# Altium PCB TRV1.0.PcbDoc (part 1 of 2)
Units mil, origin at the board's own origin, x right, y up, seen from the top; angles counter-clockwise.
Board outline 1659.57 x 2276.55 mil, 2 copper layers (Top Layer, Bottom Layer); 70 components, 42 nets, 217 pads, 204 vias.
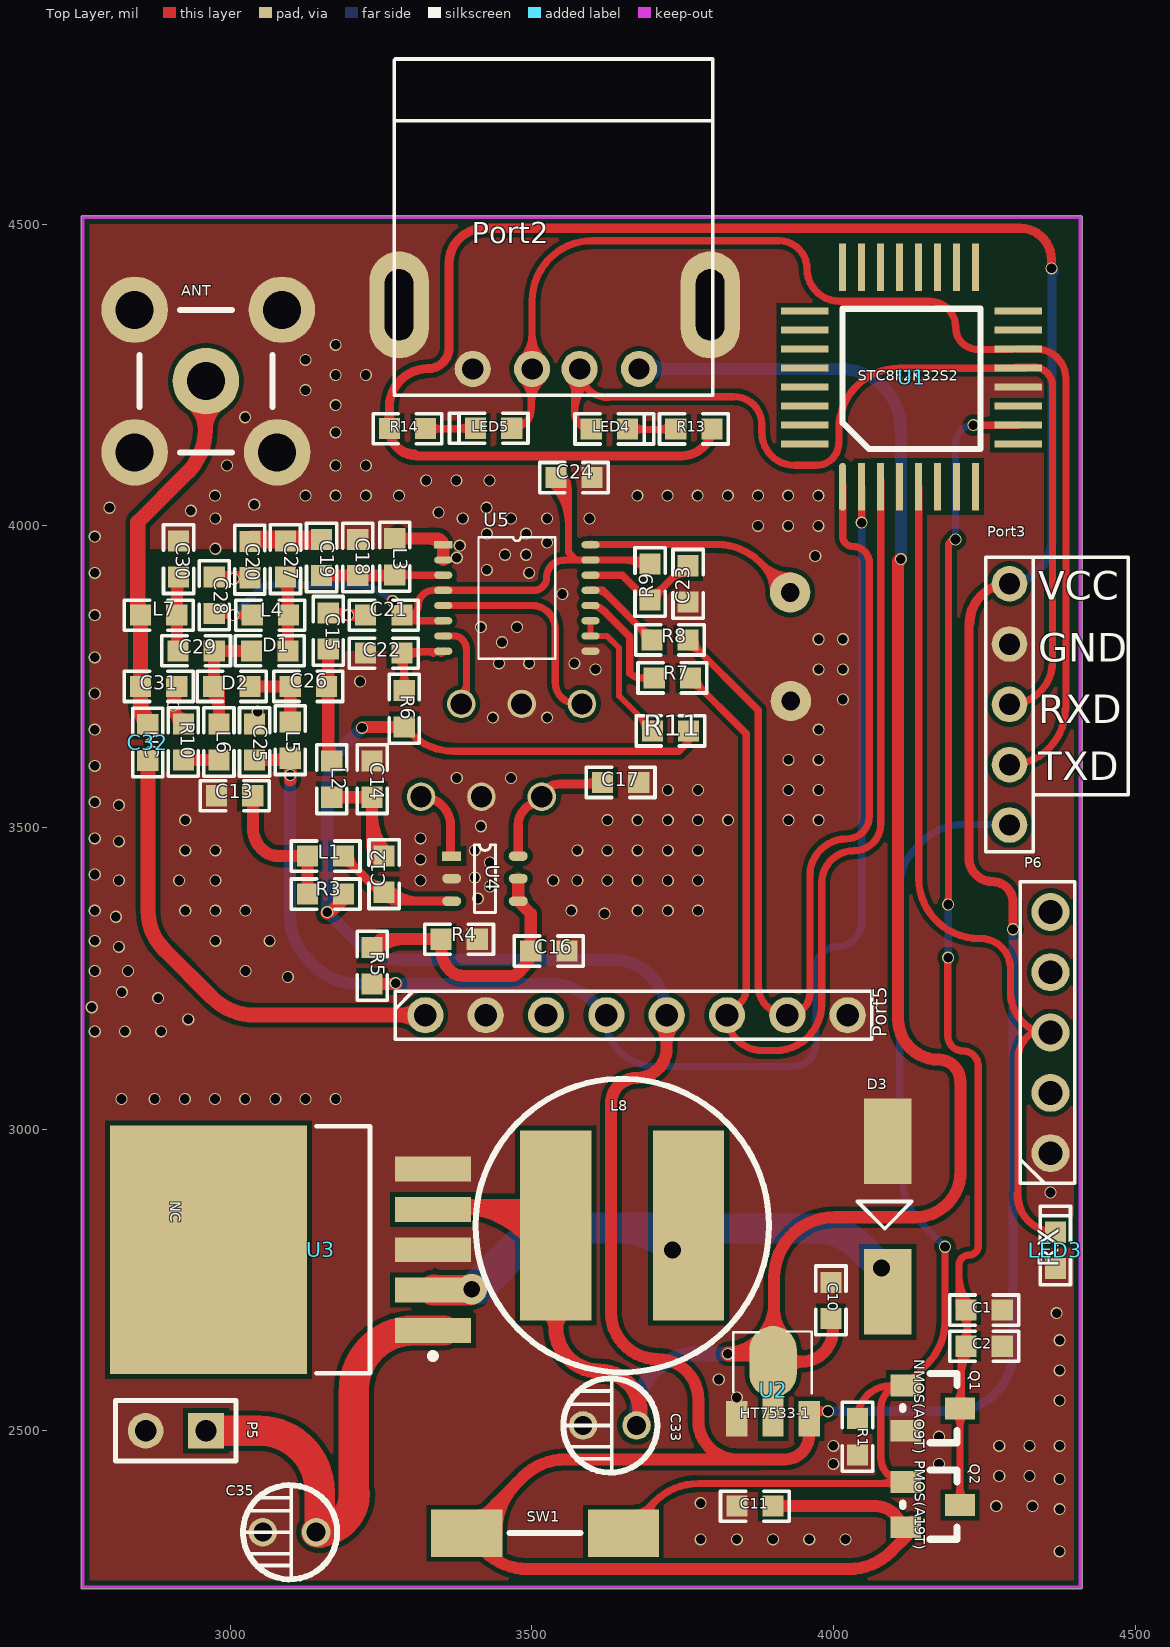
[diagram p0: Top Layer view]
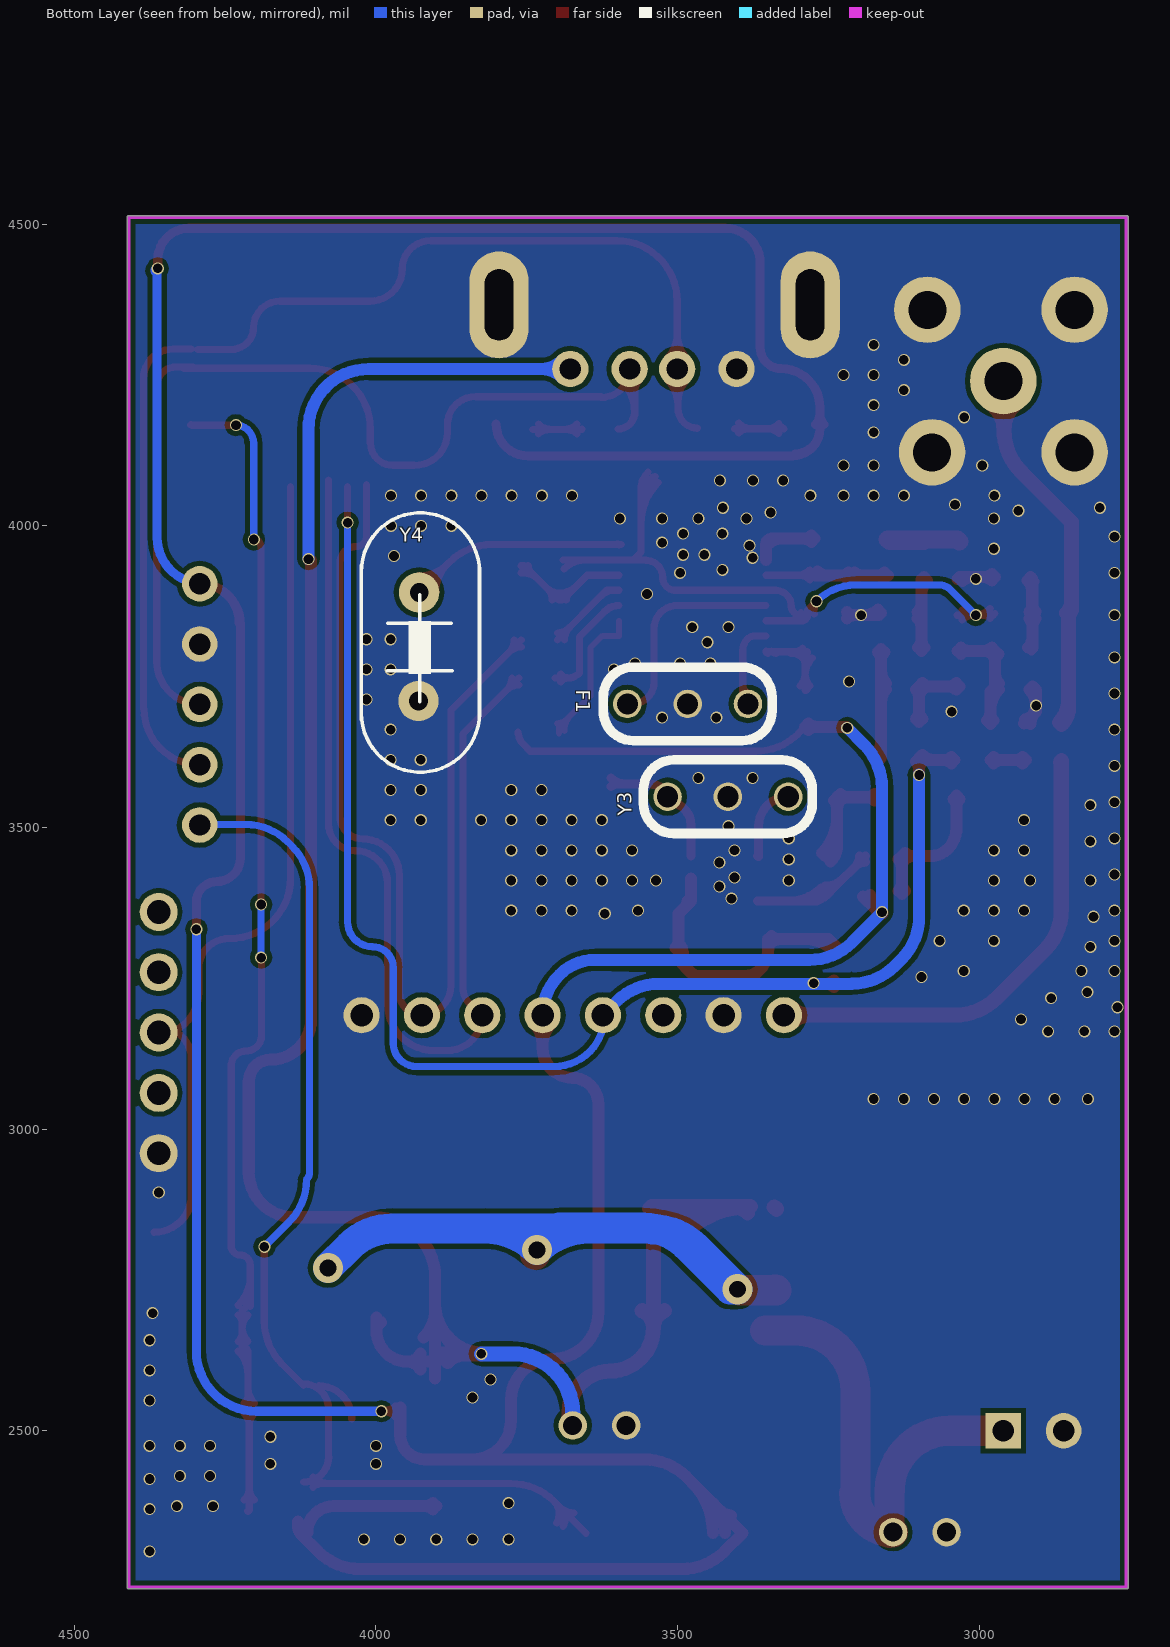
[diagram p1: Bottom Layer view, seen from below]

## Layer stack, top to bottom
Top Layer: signal copper 1.4
Dielectric: dielectric 12.6, FR-4, Dk 4.8
Bottom Layer: signal copper 1.4

## Board outline
2752.89,2240.7 2752.89,4511.22 cw(c2755.91,4511.22) 2755.91,4514.24 4409.45,4514.24 cw(c4409.45,4511.22) 4412.46,4511.22 4412.46,2240.7 cw(c4409.45,2240.7) 4409.36,2237.69 cw(c4409.28,2240.7) 4409.28,2237.69 2755.91,2237.69 cw(c2755.91,2240.7)

## Design rules (kind name [scope] priority, off if disabled: settings)
Clearance [All] p1: gap=8
PolygonConnect [All] p1: connectstyle=Direct reliefconductorwidth=10 reliefentries=4 polygonreliefangle="90 Angle"
RoomDefinition TRV1.0 [InComponentClass('TRV1.0')] p1: confinementstyle=ConfineIn formatcopy=TRUE lockcomponents=FALSE outline 0,0 2000,0 2000,1000 0,1000
RoutingVias [All] p1: holewidth=128 width=150 viastyle="Through Hole" minholewidth=2 minwidth=5 maxholewidth=28 maxwidth=50
SilkscreenOverComponentPads [All] p1: minsilkscreentomaskgap=10
SolderMaskExpansion [All] p1: expansion=4
Width [All] p1: maxlimit=80 minlimit=10 preferedwidth=10
27 further rules are at their usual default settings.

## Components (designator, comment, footprint, x,y, rotation, side; value= is the part's Value field where it differs from the comment)
ANT "SMA" SWA-KE天线母座 2960,4240 r0 top
C1 "1uF" 0603 4280,2700 r180 top
C2 "104" 0603 4280,2640 r180 top
C10 "1uF" 0603 3996,2686 r90 top
C11 "104" 0603 3900,2375 r180 top
C12 "220pF5%" 0603 3255.19,3452.57 r270 top
C13 "104" 0603 2977.62,3552.65 r0 top
C14 "4.7pF5%" 0603 3235.5,3610.05 r270 top
C15 "12pF5%" 0603 3162.66,3855.8 r270 top
C16 "104" 0603 3558.34,3295.09 r180 top
C17 "1pF+-0.25P" 0603 3617.39,3574.62 r0 top
C18 "NC" 0603 3211.64,3977.53 r270 top
C19 "1pF+-0.25P" 0603 3151.64,3977.53 r270 top
C20 "NC" 0603 3032.74,3973.91 r270 top
C21 "104" 0603 3284.71,3851.86 r180 top
C22 "104" 0603 3284.71,3788.87 r180 top
C23 "104" 0603 3759.12,3873.83 r90 top
C24 "104" 0603 3600,4080 r180 top
C25 "104" 0603 3040.62,3611.71 r90 top
C26 "220pf5%" 0603 3099.67,3733.75 r0 top
C27 "NC" 0603 3091.8,3914.86 r90 top
C28 "104" 0603 2973.69,3914.86 r270 top
C29 "220pF5%" 0603 2973.69,3792.81 r180 top
C30 "NC" 0603 2914.63,3914.86 r90 top
C31 "NC" 0603 2851.64,3733.75 r0 top
C32 "NC" 0603 2863.45,3670.76 r270 top
C33 "NC" CAP6*12 3471,2617 r180 top
C35 "NC" CAP6*12 2940,2440 r180 top
D1 "SMP1320" 0603 3095.73,3792.81 r180 top
D2 "SMP1320" 0603 3032.74,3733.75 r180 top
D3 "NC" SS34 4040,2880 r270 top
F1 "10.7M" "PT4450 XTAL" 3483.25,3704.82 r0 bottom
L1 "180uH5%" 0603 3188.26,3452.57 r180 top
L2 "22nH5%" 0603 3168.57,3610.05 r270 top
L3 "47nH5%" 0603 3272.9,3918.79 r90 top
L4 "180nH5%" 0603 3036.68,3851.86 r0 top
L5 "180nH5%" 0603 3099.67,3674.7 r270 top
L6 "180nH5%" 0603 2981.56,3611.71 r90 top
L7 "0R" 0603 2851.64,3851.86 r0 top
L8 "33UH" CD75 3700,2840 r180 top
LED3 "RX" LED-0603 4368,2829 r270 top
LED4 "RX" LED-0603 3658.7,4160.62 r180 top
LED5 "TX" LED-0603 3406.91,4161.82 r0 top
P5 "BAT" DIP2-2.54 2960,2500 r180 top
P6 "PIN-5" PCBComponent_1 4360,3160 r90 top
Port2 "USB_A" USB-A 3540,4260 r180 top
Port3 "DEBUG" STC_DEBUG 4292,3704 r0 top
Port5 "Mold" Pin-8 3723.69,3188.79 r90 top
Q1 "NMOS(AO9T)" SOT-23 4165,2540 r270 top
Q2 "PMOS(A19T)" SOT-23 4165,2380 r270 top
R1 "1M" 0603 4040,2460 r90 top
R3 "0R" 0603 3188.26,3389.58 r180 top
R4 "100k" 0603 3349.67,3314.77 r0 top
R5 "0R" 0603 3235.5,3240.79 r90 top
R6 "10R" 0603 3288.65,3666.82 r90 top
R7 "10K" 0603 3763.06,3747.85 r180 top
R8 "10K" 0603 3759.12,3810.84 r180 top
R9 "NC" 0603 3696.13,3936.82 r270 top
R10 "3.3K1%" 0603 2922.51,3611.71 r90 top
R11 "0R" 0603 3700,3660 r0 top
R13 "1.3K" 0603 3738.7,4160.62 r0 top
R14 "1.3K" 0603 3324,4161 r180 top
SW1 "REST" SW-1 3463,2409 r90 top
U1 "STC8F2K32S2" LQPF-32 3980,4100 r90 top
U2 "HT7533-1" 3A5A3D 3900,2520 r0 top
U3 "NC" TS5B_N 3100,2800 r180 top
U4 "PT4450" PT4450 3365.42,3448.63 r270 top
U5 "PT4302" PT4302 3353.33,3968.6 r0 top
Y3 "433.92M" "PT4450 XTAL" 3416.6,3551 r180 bottom
Y4 "13.226M" "PT4306 XTAL" 3928.41,3889.58 r270 bottom

## Footprints (in the part's own frame and the unit in brackets; to place one, negate y for a bottom-side part, rotate by r counter-clockwise, add the part's x,y. Pads: shape width x height; smd on the part's side, far side on the other; paste and mask are expansions set on the pad)
3A5A3D [mm]
  rect 0.9x1.5 smd: 1(-1.524,0) 3(1.524,0)
  rect 0.9x1.8 smd: 2(0,0.15)
  oval 2x3 smd: 2(0,2.4)
  silkscreen extent -1.68,1.07 1.63,3.67
0603 [mil]
  rect 35x35 smd: 1(0,0) 2(60,0)
  silkscreen extent -27,-25 87,25
CAP6*12 [mm]
  round 1.2 hole 0.8: 1(-5.15,2.75) 2(-2.9,2.75)
  silkscreen extent -6.03,0.75 -2.05,4.75
CD75 [mm]
  rect 3x8 smd: 1(-1.524,0) 2(4.064,0)
  silkscreen extent -4.91,-6.18 7.45,6.18
DIP2-2.54 [mm] "Connector; Header; 2 Position"
  rect 1.5x1.5 hole 0.9: 1(0,0)
  round 1.5 hole 0.9: 2(2.54,0)
  silkscreen extent -1.27,-1.27 3.81,1.27
LED-0603 [mil]
  rect 35x35 smd: 1(0,0) 2(60,0)
  silkscreen extent -43,-25 87,25
LQPF-32 [mm]
  oct 2x0.3 smd: 1(-0.9,-0.9)
  rect 2x0.3 smd: 2(-0.9,-1.7) 3(-0.9,-2.5) 4(-0.9,-3.3) 5(-0.9,-4.1) 6(-0.9,-4.9) 7(-0.9,-5.7) 8(-0.9,-6.5) 17(8.35,-6.5) 18(8.35,-5.7) 19(8.35,-4.9) 20(8.35,-4.1) 21(8.35,-3.3) 22(8.35,-2.5) 23(8.35,-1.7) 24(8.35,-0.9)
  rect 0.3x2 smd: 9(0.9,-8.3) 10(1.7,-8.3) 11(2.5,-8.3) 12(3.3,-8.3) 13(4.1,-8.3) 14(4.9,-8.3) 15(5.7,-8.3) 16(6.5,-8.3) 25(6.5,0.7) 26(5.7,0.7) 27(4.9,0.7) 28(4.1,0.7) 29(3.3,0.7) 30(2.5,0.7) 31(1.7,0.7) 32(0.9,0.7)
  silkscreen extent 0.7,-6.7 6.6,-0.9
PCBComponent_1 [mm]
  round 1.6 hole 1: 1(-5.08,0) 2(-2.54,0) 3(0,0) 4(2.54,0) 5(5.08,0)
  silkscreen extent -6.35,-1.02 6.35,1.27
Pin-8 [mil]
  round 60 hole 37.4: 1(0,400) 2(0,300) 3(0,200) 4(0,100) 5(0,0) 6(0,-100) 7(0,-200) 8(0,-300)
  silkscreen extent -40,-340 40,450
PT4302 [mil]
  rect 30x12 smd: 1(0,0)
  oval 30x12 smd: 2(0,-25.2) 3(0,-50.39) 4(0,-75.59) 5(0,-100.79) 6(0,-125.99) 7(0,-151.18) 8(0,-176.38) 9(244.09,-176.38) 10(244.09,-151.18) 11(244.09,-125.99) 12(244.09,-100.79) 13(244.09,-75.59) 14(244.09,-50.39) 15(244.09,-25.2) 16(244.09,0)
  silkscreen extent 58,-189 186,13
"PT4306 XTAL" [mil]
  round 66.93 hole 31: 1(0,0) 2(180,-1)
  silkscreen extent -132,-96 298,100
PT4450 [mm]
  rect 0.4x0.8 smd: 1(-0.1,0.05)
  oval 0.4x0.8 smd: 2(0.85,0.05) 3(1.8,0.05) 4(1.8,2.85) 5(0.85,2.85) 6(-0.1,2.85)
  silkscreen extent -0.57,1 2.28,1.89
"PT4450 XTAL" [mm]
  round 1.2 hole 0.889: 1(-2.54,0) 2(0,0) 3(2.54,0)
  silkscreen extent -3.56,-1.55 3.56,1.55
SOT-23 [mil]
  rect 36x50 smd: 1(40,-45) 2(-35,-45) 3(3,45)
  silkscreen extent -55,-50 60,40
SS34 [mm]
  rect 3.6x2 smd: 1(-2.54,1.27) 2(3.81,1.27)
  silkscreen extent 0,0 1.14,2.29
STC_DEBUG [mm]
  round 1.5 hole 0.9: 1(0,5.08) 2(0,2.54) 3(0,0) 4(0,-2.54) 5(0,-5.08)
  silkscreen extent -1,-6.2 5,6.2
SW-1 [mm]
  rect 2x3 smd: 1(-2,1.8) 2(-2,-4.8)
  silkscreen extent -2,-3 -2,0
SWA-KE天线母座 [mm]
  round 2.8 hole 1.6: 1(0,0) 2(-3,-3) 2(-3,3) 2(3,-3) 2(3.2,3)
  silkscreen extent -2.8,-3 2.8,3
TS5B_N [mm] "D2-PAK, 6-Leads, Body 8.6x10.2mm, Pitch 1.7mm, Lead Span 14.1mm, IPC Medium Density"
  rect 3.2x1.05 smd: 1(-6,3.4) 2(-6,1.7) 3(-6,0) 4(-6,-1.7) 5(-6,-3.4)
  rect 8.3x10.45 smd: 6(3.45,0)
  silkscreen extent -6.13,-5.2 -1.1,5.2, body extent -3.35,-5.2 6.05,5.2, height 4.65
USB-A [mm]
  round 1.524 hole 0.9: 1(-3.5,0) 2(-1,0) 3(1,0) 4(3.5,0)
  oval 2.5x4.5 hole 1.2 slot 3 at 90 deg: 4(-6.5,-2.7) 4(6.6,-2.7)
  silkscreen extent -6.6,-13.05 6.8,1.1

## Part data
ANT L1 L2 L3 R1 R3 R4 R5 R6 R7 R8 R9 R10 R11 R13 R14: library part Res2, "Resistor"
C1 C2 C10 C11 C12 C13 C14 C15 C16 C17 C18 C19 C20 C21 C22 C23 C24 C25 C26 C27 C28 C29 C30 C31 C32: library part Cap, "Capacitor"
C33 C35: library part CAP2
D1 D2 D3 LED3 LED4 LED5: library part DIODE, "diode"
F1: library part Filter
L4 L5 L6 L7 L8: library part L, "Inductor"
Port2: library part USB
Port3: library part PIN-5
Port5: library part Pin-8
Q1: library part MOSFET-N, "mosfet"
Q2: library part MOSFET-P, "mosfet"
SW1: library part SW-P, "key"
U1: library part STC8F2K64S2
U3: library part LM2596
Y3: library part PT4450-XTAL
Y4: library part XTAL, "Crystal Oscillator"

## Via types
v1: diameter 20, hole 16, Top Layer to Bottom Layer, 201 vias
v2: diameter 50, hole 28, Top Layer to Bottom Layer, 3 vias

## Nets (pads, with @x,y where several pads share a name; then routed paths per layer and width w, separated by ;. In a path a pad name is that pad's centre, name@x,y a point inside that pad or via, vN(x,y) a via of type N, cw(c..) or ccw(c..) an arc to the next point about the centre after c; other vN are vias at no path point)
ANT: ANT.1 C31.1 C32.1 L7.1 | length 1201.9
  Top Layer w25: L7.1@2850.23,3855.27 ccw(c2855.04,3855.27) L7.1@2851.64,3851.86 ; C32.1@2863.45,3670.76 cw(c2891.97,3699.28) 2851.64,3699.28 C31.1@2851.64,3733.75 L7.1@2851.64,3851.86 ; ANT.1@2958.94,4224.26 2958.94,4159.42 ; 2846.96,3875.23 ccw(c2875.01,3875.23) L7.1@2855.18,3855.4 ; 2846.96,3875.23 ccw(c2875.01,3875.23) L7.1@2855.18,3855.4 ; 2846.96,3875.23 ccw(c2875.01,3875.23) L7.1@2855.18,3855.4 ; 2851.64,3699.27 ccw(c2879.23,3699.27) C32.1@2865.87,3675.14 ; 2851.64,3699.27 ccw(c2879.23,3699.27) C32.1@2865.87,3675.14 ; 2851.64,3699.27 ccw(c2879.23,3699.27) C32.1@2865.87,3675.14 ; 2851.64,3711.35 ccw(c2904.04,3711.35) C32.1@2866.99,3674.3 ; 2851.64,3711.35 ccw(c2904.04,3711.35) C32.1@2866.99,3674.3 ; 2851.64,3711.35 ccw(c2904.04,3711.35) C32.1@2866.99,3674.3 ; L7.1@2851.64,3851.86 cw(c2857.02,3857.24) 2849.41,3857.24 cw(c2855.33,3863.16) 2846.96,3863.16 2846.96,4006.02 2929.65,4088.71 ccw(c2858.94,4159.42) 2958.94,4159.42 ; ANT.1@2935.29,4205.28 cw(c2902.66,4159.42) 2958.94,4159.42 ; ANT.1@2935.29,4205.28 cw(c2902.66,4159.42) 2958.94,4159.42 ; ANT.1@2935.29,4205.28 cw(c2902.66,4159.42) 2958.94,4159.42 ; 2958.94,4159.42 cw(c3012.5,4159.42) ANT.1@2983.27,4204.29 ; 2958.94,4159.42 cw(c3012.5,4159.42) ANT.1@2983.27,4204.29 ; 2958.94,4159.42 cw(c3012.5,4159.42) ANT.1@2983.27,4204.29
CE: LED3.1 P6.3 U1.5 | length 1739.5
  Top Layer w12: U1.5@4141.42,4064.57 4141.42,3415.95 ccw(c4241.42,3415.95) 4241.42,3315.95 4243.64,3315.95 cw(c4243.64,3265.99) 4293.6,3265.99 4293.6,3227.79 4293.6,3226.81 ccw(c4364.13,3226.81) P6.3@4364.13,3156.28 ; P6.3@4356.98,3167.76 ccw(c4356.98,3116.76) 4305.98,3116.76 4305.98,2891.02 ccw(c4368,2891.02) LED3.1@4368,2829 ; 4304.36,2892.64 ccw(c4368,2892.64) LED3.1@4368,2829 ; 4304.36,2892.64 ccw(c4368,2892.64) LED3.1@4368,2829 ; 4304.36,2892.64 ccw(c4368,2892.64) LED3.1@4368,2829
CEOUT: U1.4
CNET: U1.15
GND: ANT.2 C1.1 C2.1 C10.2 C11.2 C13.1 C14.1 C15.1 C16.1 C17.2 C18.1 C20.2 C21.2 C22.2 C23.1 C24.1 C25.2 C28.1 C30.2 C31.2 C33.2 C35.2 D3.1 F1.2 L3.2 LED3.2 P5.2 P6.1 Port2.4 Port3.2 Port5.2 Port5.8 Q1.1 R1.1 R4.2 R10.2 U1.12 U2.1 U3.3 U3.5 U4.2 U5.1 U5.2 U5.9 Y3.2 Y4.2 | length 1045.1
  Top Layer w20: C31.2@2911.64,3733.75 2905.66,3727.77 v1(2905.66,3702.02) ; R10.2@2925.66,3672.02 2905.66,3692.02 v1(2905.66,3702.02) ; C28.1@2973.69,3914.86 3032.82,3914.86 C20.2@3035.66,3912.02 ; C15.1@3162.66,3855.8 3166.45,3852.02 C21.2@3215.66,3852.02 ; L3.2@3272.9,3978.79 3343.14,3978.79 cw(c3343.14,3968.6) U5.1@3353.33,3968.6 U5.2@3353.33,3943.4 ; v1@2905.66,3701.46 cw(c2943.57,3701.46) C31.2@2916.91,3728.42 ; v1@2905.66,3701.46 cw(c2943.57,3701.46) C31.2@2916.91,3728.42 ; v1@2905.66,3701.46 cw(c2943.57,3701.46) C31.2@2916.91,3728.42 ; v1(2905.66,3702.02) ccw(c2929.8,3702.02) R10.2@2912.73,3684.95 ; v1(2905.66,3702.02) ccw(c2929.2,3702.02) R10.2@2924.12,3679.03 ; v1(2905.66,3702.02) ccw(c2929.8,3702.02) R10.2@2912.73,3684.95 ; v1(2905.66,3702.02) ccw(c2929.2,3702.02) R10.2@2924.12,3679.03 ; v1(2905.66,3702.02) ccw(c2929.8,3702.02) R10.2@2912.73,3684.95 ; v1(2905.66,3702.02) ccw(c2929.2,3702.02) R10.2@2924.12,3679.03 ; 2907.25,3690.42 cw(c2888.54,3671.71) R10.2@2915.01,3671.71 ; 2907.25,3690.42 cw(c2888.54,3671.71) R10.2@2915.01,3671.71 ; 2907.25,3690.42 cw(c2888.54,3671.71) R10.2@2915.01,3671.71 ; C28.1@2978.99,3909.55 cw(c2991.79,3896.75) 2991.79,3914.86 ; C28.1@2978.99,3909.55 cw(c2991.79,3896.75) 2991.79,3914.86 ; C28.1@2978.99,3909.55 cw(c2991.79,3896.75) 2991.79,3914.86 ; C28.1@2978.99,3920.16 ccw(c2991.79,3932.96) 2991.79,3914.86 ; C28.1@2978.99,3920.16 ccw(c2991.79,3932.96) 2991.79,3914.86 ; C28.1@2978.99,3920.16 ccw(c2991.79,3932.96) 2991.79,3914.86 ; v1@3012.36,3914.86 cw(c3012.36,3893.52) C20.2@3027.44,3908.61 ; v1@3012.36,3914.86 cw(c3012.36,3893.52) C20.2@3027.44,3908.61 ; v1@3012.36,3914.86 cw(c3012.36,3893.52) C20.2@3027.44,3908.61 ; C15.1@3167.97,3861.1 ccw(c3189.9,3883.04) v1@3189.9,3852.02 ; C15.1@3167.97,3861.1 ccw(c3189.9,3883.04) v1@3189.9,3852.02 ; C15.1@3167.97,3861.1 ccw(c3189.9,3883.04) v1@3189.9,3852.02 ; 3206.23,3852.02 cw(c3206.23,3833.38) C21.2@3219.41,3846.56 ; 3206.23,3852.02 cw(c3206.23,3833.38) C21.2@3219.41,3846.56 ; 3206.23,3852.02 cw(c3206.23,3833.38) C21.2@3219.41,3846.56 ; 3206.98,3852.02 ccw(c3206.98,3869.59) C21.2@3219.41,3857.17 ; 3206.98,3852.02 ccw(c3206.98,3869.59) C21.2@3219.41,3857.17 ; 3206.98,3852.02 ccw(c3206.98,3869.59) C21.2@3219.41,3857.17 ; L3.2@3278.2,3973.49 cw(c3291.01,3960.69) 3291.01,3978.79 ; L3.2@3278.2,3973.49 cw(c3291.01,3960.69) 3291.01,3978.79 ; L3.2@3278.2,3973.49 cw(c3291.01,3960.69) 3291.01,3978.79 ; L3.2@3278.2,3984.1 ccw(c3291.01,3996.9) 3291.01,3978.79 ; L3.2@3278.2,3984.1 ccw(c3291.01,3996.9) 3291.01,3978.79 ; L3.2@3278.2,3984.1 ccw(c3291.01,3996.9) 3291.01,3978.79 ; 3329.37,3978.79 cw(c3329.37,3953.64) U5.1@3347.16,3971.42 ; 3329.37,3978.79 cw(c3329.37,3953.64) U5.1@3347.16,3971.42 ; 3329.37,3978.79 cw(c3329.37,3953.64) U5.1@3347.16,3971.42
  other v1: 4375,2300 3780,2320 3840,2320 3900,2320 3960,2320 4020,2320 4375,2370 4270,2375 4330,2375 3780,2380 4375,2420 4275,2425 4325,2425 4000,2445 4175,2445 4000,2475 4275,2475 4325,2475 4375,2475 4175,2490 4375,2550 3840,2555 3810,2585 4375,2600 4375,2650 4370,2695 4360,2895 2820,3050 2875,3050 2925,3050 2975,3050 3025,3050 3075,3050 3125,3050 3175,3050 2775.66,3162.02 2825.66,3162.02 2885.66,3162.02 2930.66,3182.02 2770.66,3202.02 2880.66,3217.02 2820.66,3227.02 3095.66,3252.02 2775.66,3262.02 2830.66,3262.02 3025.66,3262.02 2815.66,3302.02 2775.66,3312.02 2975.66,3312.02 3065.66,3312.02 2810.66,3352.02 3620.66,3357.02 2775.66,3362.02 2925.66,3362.02 2975.66,3362.02 3025.66,3362.02 3565.66,3362.02 3675.66,3362.02 3725.66,3362.02 3775.66,3362.02 3410.66,3382.02 3430.66,3402.02 2815.66,3412.02 2915.66,3412.02 2975.66,3412.02 3315.66,3412.02 3535.66,3412.02 3575.66,3412.02 3625.66,3412.02 3675.66,3412.02 3725.66,3412.02 3775.66,3412.02 3405.66,3417.02 2775.66,3422.02 3430.66,3442.02 3315.66,3447.02 2925.66,3462.02 2975.66,3462.02 3405.66,3462.02 3575.66,3462.02 3625.66,3462.02 3675.66,3462.02 3725.66,3462.02 3775.66,3462.02 2815.66,3477.02 2775.66,3482.02 3315.66,3482.02 3415.66,3502.02 2925.66,3512.02 3625.66,3512.02 3675.66,3512.02 3725.66,3512.02 3775.66,3512.02 3825.66,3512.02 3925.66,3512.02 3975.66,3512.02 2815.66,3537.02 2775.66,3542.02 3725.66,3562.02 3775.66,3562.02 3925.66,3562.02 3975.66,3562.02 3375.66,3582.02 3465.66,3582.02 2775.66,3602.02 3925.66,3612.02 3975.66,3612.02 2775.66,3662.02 3975.66,3662.02 3435.66,3682.02 3525.66,3682.02 3045.66,3692.02 4015.66,3712.02 2775.66,3722.02 3215.66,3742.02 3605.66,3762.02 3975.66,3762.02 4015.66,3762.02 3445.66,3772.02 3495.66,3772.02 3570.66,3772.02 2775.66,3782.02 3450.66,3807.02 3975.66,3812.02 4015.66,3812.02 3415.66,3832.02 3475.66,3832.02 2775.66,3852.02 3195.66,3852.02 3550.66,3887.02 3005.66,3912.02 2775.66,3922.02 3495.66,3922.02 3425.66,3927.02 3375.66,3947.02 3970,3950 3455.66,3952.02 3490.66,3952.02 2975.66,3962.02 3380.66,3967.02 3525.66,3972.02 2775.66,3982.02 3425.66,3987.02 3490.66,3987.02 3875,4000 3925,4000 3975,4000 2975.66,4012.02 3385.66,4012.02 3465.66,4012.02 3525.66,4012.02 3595.66,4012.02 3345.66,4022.02 2935,4025 2800,4030 3425,4030 3040,4035 2975,4050 3125,4050 3175,4050 3225,4050 3280,4050 3675,4050 3725,4050 3775,4050 3825,4050 3875,4050 3925,4050 3975,4050 3325,4075 3375,4075 3430,4075 2995,4100 3175,4100 3225,4100 3175,4155 3025,4180 3175,4200 3125,4225 3175,4250 3225,4250 3125,4275 3175,4300
NetC12_1: C12.1 C14.2 L2.2 | length 802.1
  Top Layer w20: L2.2@3168.57,3550.05 C14.2@3235.5,3550.05 3235.5,3472.26 C12.1@3255.19,3452.57 ; L2.2@3173.87,3544.75 cw(c3186.68,3531.94) 3186.68,3550.05 ; L2.2@3173.87,3544.75 cw(c3186.68,3531.94) 3186.68,3550.05 ; L2.2@3173.87,3544.75 cw(c3186.68,3531.94) 3186.68,3550.05 ; L2.2@3173.87,3555.35 ccw(c3186.68,3568.16) 3186.68,3550.05 ; L2.2@3173.87,3555.35 ccw(c3186.68,3568.16) 3186.68,3550.05 ; L2.2@3173.87,3555.35 ccw(c3186.68,3568.16) 3186.68,3550.05 ; 3217.39,3550.05 cw(c3217.39,3531.94) C14.2@3230.2,3544.75 ; 3217.39,3550.05 ccw(c3217.39,3568.16) C14.2@3230.2,3555.35 ; 3217.39,3550.05 cw(c3217.39,3531.94) C14.2@3230.2,3544.75 ; 3217.39,3550.05 ccw(c3217.39,3568.16) C14.2@3230.2,3555.35 ; 3217.39,3550.05 cw(c3217.39,3531.94) C14.2@3230.2,3544.75 ; 3217.39,3550.05 ccw(c3217.39,3568.16) C14.2@3230.2,3555.35 ; C14.2@3230.2,3544.75 cw(c3217.39,3531.94) 3235.5,3531.94 ; C14.2@3230.2,3544.75 cw(c3217.39,3531.94) 3235.5,3531.94 ; C14.2@3230.2,3544.75 cw(c3217.39,3531.94) 3235.5,3531.94 ; 3235.5,3469.92 ccw(c3272.53,3469.92) C12.1@3246.35,3443.73 ; 3235.5,3469.92 ccw(c3272.53,3469.92) C12.1@3246.35,3443.73 ; 3235.5,3469.92 ccw(c3272.53,3469.92) C12.1@3246.35,3443.73 ; 3235.5,3518.2 ccw(c3320.82,3518.2) C12.1@3260.49,3457.87 ; 3235.5,3518.2 ccw(c3320.82,3518.2) C12.1@3260.49,3457.87 ; 3235.5,3518.2 ccw(c3320.82,3518.2) C12.1@3260.49,3457.87 ; 3235.5,3531.94 cw(c3253.61,3531.94) C14.2@3240.8,3544.75 ; 3235.5,3531.94 cw(c3253.61,3531.94) C14.2@3240.8,3544.75 ; 3235.5,3531.94 cw(c3253.61,3531.94) C14.2@3240.8,3544.75 ; C12.1@3242.38,3465.37 cw(c3229.58,3452.57) C12.1@3247.69,3452.57 ; C12.1@3242.38,3465.37 ccw(c3255.19,3478.18) C12.1@3255.19,3460.07 ; C12.1@3242.38,3465.37 cw(c3229.58,3452.57) C12.1@3247.69,3452.57 ; C12.1@3242.38,3465.37 ccw(c3255.19,3478.18) C12.1@3255.19,3460.07 ; C12.1@3242.38,3465.37 cw(c3229.58,3452.57) C12.1@3247.69,3452.57 ; C12.1@3242.38,3465.37 ccw(c3255.19,3478.18) C12.1@3255.19,3460.07
NetC12_2: C12.2 L1.1 U4.3 | length 686.8
  Top Layer w15: L1.1@3188.26,3452.57 3248.26,3392.57 C12.2@3255.19,3392.57 3269.99,3377.77 U4.3@3367.39,3377.77 ; L1.1@3188.26,3442.57 cw(c3188.26,3418.43) L1.1@3205.33,3435.5 ; L1.1@3188.26,3442.57 cw(c3188.26,3418.43) L1.1@3205.33,3435.5 ; L1.1@3188.26,3442.57 cw(c3188.26,3418.43) L1.1@3205.33,3435.5 ; L1.1@3198.26,3452.57 ccw(c3222.4,3452.57) L1.1@3205.33,3435.5 ; L1.1@3198.26,3452.57 ccw(c3222.4,3452.57) L1.1@3205.33,3435.5 ; L1.1@3198.26,3452.57 ccw(c3222.4,3452.57) L1.1@3205.33,3435.5 ; 3226.29,3414.54 ccw(c3255.19,3443.44) C12.2@3255.19,3402.57 ; 3226.29,3414.54 ccw(c3255.19,3443.44) C12.2@3255.19,3402.57 ; 3226.29,3414.54 ccw(c3255.19,3443.44) C12.2@3255.19,3402.57 ; C12.2@3251.65,3389.03 ccw(c3278.85,3416.24) 3278.85,3377.77 ; C12.2@3251.65,3389.03 ccw(c3278.85,3416.24) 3278.85,3377.77 ; C12.2@3251.65,3389.03 ccw(c3278.85,3416.24) 3278.85,3377.77 ; C12.2@3262.26,3399.64 ccw(c3315.07,3452.45) 3315.07,3377.77 ; C12.2@3262.26,3399.64 ccw(c3315.07,3452.45) 3315.07,3377.77 ; C12.2@3262.26,3399.64 ccw(c3315.07,3452.45) 3315.07,3377.77
NetC13_2: C13.2 L1.2 R3.2 | length 581.1
  Top Layer w20: C13.2@3035.57,3547.69 cw(c3042.58,3547.69) C13.2@3037.62,3552.65 3037.62,3499.23 ccw(c3086.42,3499.23) 3051.92,3464.72 ccw(c3081.26,3494.06) 3081.26,3452.57 L1.2@3128.26,3452.57 R3.2@3128.26,3389.58 ; C13.2@3032.32,3547.35 cw(c3019.52,3534.54) 3037.62,3534.54 ; C13.2@3032.32,3547.35 cw(c3019.52,3534.54) 3037.62,3534.54 ; C13.2@3032.32,3547.35 cw(c3019.52,3534.54) 3037.62,3534.54 ; 3037.62,3534.54 cw(c3055.73,3534.54) C13.2@3042.93,3547.35 ; 3037.62,3534.54 cw(c3055.73,3534.54) C13.2@3042.93,3547.35 ; 3037.62,3534.54 cw(c3055.73,3534.54) C13.2@3042.93,3547.35 ; 3110.15,3452.57 cw(c3110.15,3434.46) L1.2@3122.95,3447.27 ; 3110.15,3452.57 ccw(c3110.15,3470.68) L1.2@3122.95,3457.87 ; 3110.15,3452.57 cw(c3110.15,3434.46) L1.2@3122.95,3447.27 ; 3110.15,3452.57 ccw(c3110.15,3470.68) L1.2@3122.95,3457.87 ; 3110.15,3452.57 cw(c3110.15,3434.46) L1.2@3122.95,3447.27 ; 3110.15,3452.57 ccw(c3110.15,3470.68) L1.2@3122.95,3457.87 ; R3.2@3122.95,3394.88 ccw(c3110.15,3407.68) 3128.26,3407.68 ; R3.2@3122.95,3394.88 ccw(c3110.15,3407.68) 3128.26,3407.68 ; R3.2@3122.95,3394.88 ccw(c3110.15,3407.68) 3128.26,3407.68 ; L1.2@3122.95,3447.27 cw(c3110.15,3434.46) 3128.26,3434.46 ; L1.2@3122.95,3447.27 cw(c3110.15,3434.46) 3128.26,3434.46 ; L1.2@3122.95,3447.27 cw(c3110.15,3434.46) 3128.26,3434.46 ; 3128.26,3407.68 ccw(c3146.36,3407.68) R3.2@3133.56,3394.88 ; 3128.26,3407.68 ccw(c3146.36,3407.68) R3.2@3133.56,3394.88 ; 3128.26,3407.68 ccw(c3146.36,3407.68) R3.2@3133.56,3394.88 ; 3128.26,3434.46 cw(c3146.36,3434.46) L1.2@3133.56,3447.27 ; 3128.26,3434.46 cw(c3146.36,3434.46) L1.2@3133.56,3447.27 ; 3128.26,3434.46 cw(c3146.36,3434.46) L1.2@3133.56,3447.27
NetC16_2: C16.2 R4.1 R5.2 U4.4 U4.5 | length 908.6
  Top Layer w20: R5.2@3235.5,3300.79 3249.48,3314.77 R4.1@3349.67,3314.77 3349.67,3299.67 ccw(c3401.49,3299.67) 3364.85,3263.03 ccw(c3386.9,3285.08) 3386.9,3253.9 3465.32,3253.9 ccw(c3465.32,3270.58) 3477.12,3258.79 3487.66,3269.33 ccw(c3461.9,3295.09) C16.2@3498.34,3295.09 3498.34,3357.06 U4.4@3477.63,3377.77 U4.5@3477.63,3415.17 ; R5.2@3240.8,3295.49 cw(c3287.37,3248.92) 3287.37,3314.77 ; R5.2@3240.8,3295.49 cw(c3287.37,3248.92) 3287.37,3314.77 ; R5.2@3240.8,3295.49 cw(c3287.37,3248.92) 3287.37,3314.77 ; 3331.57,3314.77 cw(c3331.57,3296.67) R4.1@3344.37,3309.47 ; 3331.57,3314.77 ccw(c3331.57,3332.88) R4.1@3344.37,3320.08 ; 3331.57,3314.77 cw(c3331.57,3296.67) R4.1@3344.37,3309.47 ; 3331.57,3314.77 ccw(c3331.57,3332.88) R4.1@3344.37,3320.08 ; 3331.57,3314.77 cw(c3331.57,3296.67) R4.1@3344.37,3309.47 ; 3331.57,3314.77 ccw(c3331.57,3332.88) R4.1@3344.37,3320.08 ; U4.4@3483.37,3377.77 ccw(c3497.25,3377.77) 3487.44,3367.95 ; U4.4@3483.37,3377.77 ccw(c3497.25,3377.77) 3487.44,3367.95 ; U4.4@3483.37,3377.77 ccw(c3497.25,3377.77) 3487.44,3367.95 ; 3484.67,3266.33 ccw(c3466.04,3284.96) C16.2@3491.18,3292.85 ; 3484.67,3266.33 ccw(c3466.04,3284.96) C16.2@3491.18,3292.85 ; 3484.67,3266.33 ccw(c3466.04,3284.96) C16.2@3491.18,3292.85 ; C16.2@3493.03,3300.39 ccw(c3480.23,3313.2) 3498.34,3313.2 ; C16.2@3493.03,3300.39 ccw(c3480.23,3313.2) 3498.34,3313.2 ; C16.2@3493.03,3300.39 ccw(c3480.23,3313.2) 3498.34,3313.2 ; 3498.34,3313.2 ccw(c3516.44,3313.2) C16.2@3503.64,3300.39 ; 3498.34,3313.2 ccw(c3516.44,3313.2) C16.2@3503.64,3300.39 ; 3498.34,3313.2 ccw(c3516.44,3313.2) C16.2@3503.64,3300.39
NetC17_1: C17.1 U4.6 Y3.1 | length 340.7
  Top Layer w15: U4.6@3477.63,3452.57 3477.63,3503.99 cw(c3515.66,3503.99) 3515.66,3542.02 cw(c3545.66,3542.02) 3545.66,3572.02 C17.1@3605.66,3572.02 ; 3586.98,3572.02 ccw(c3586.98,3605.03) C17.1@3610.32,3581.69 ; 3586.98,3572.02 ccw(c3586.98,3605.03) C17.1@3610.32,3581.69 ; 3586.98,3572.02 ccw(c3586.98,3605.03) C17.1@3610.32,3581.69 ; 3599.52,3572.02 cw(c3599.52,3556.75) C17.1@3610.32,3567.55 ; 3599.52,3572.02 cw(c3599.52,3556.75) C17.1@3610.32,3567.55 ; 3599.52,3572.02 cw(c3599.52,3556.75) C17.1@3610.32,3567.55
  Top Layer w30: Y3.1@3516.6,3551 Y3.1@3522.75,3557.14
NetC18_2: C18.2 C19.2 L3.1 U5.3 | length 643.5
  Top Layer w12: L3.1@3271.64,3917.53 cw(c3272.31,3917.53) 3272.31,3918.2 U5.3@3353.33,3918.2 ; L3.1@3281.03,3910.66 cw(c3299.24,3892.46) 3299.24,3918.2 ; L3.1@3281.03,3910.66 cw(c3299.24,3892.46) 3299.24,3918.2 ; L3.1@3281.03,3910.66 cw(c3299.24,3892.46) 3299.24,3918.2 ; L3.1@3281.03,3926.92 ccw(c3302.09,3947.98) 3302.09,3918.2 ; L3.1@3281.03,3926.92 ccw(c3302.09,3947.98) 3302.09,3918.2 ; L3.1@3281.03,3926.92 ccw(c3302.09,3947.98) 3302.09,3918.2
  Top Layer w20: C19.2@3151.64,3917.53 C18.2@3211.64,3917.53 3271.64,3917.53 L3.1@3272.9,3918.79 ; C19.2@3156.94,3912.23 cw(c3169.75,3899.43) 3169.75,3917.53 ; C19.2@3156.94,3912.23 cw(c3169.75,3899.43) 3169.75,3917.53 ; C19.2@3156.94,3912.23 cw(c3169.75,3899.43) 3169.75,3917.53 ; C19.2@3156.94,3922.84 ccw(c3169.75,3935.64) 3169.75,3917.53 ; C19.2@3156.94,3922.84 ccw(c3169.75,3935.64) 3169.75,3917.53 ; C19.2@3156.94,3922.84 ccw(c3169.75,3935.64) 3169.75,3917.53 ; 3193.53,3917.53 cw(c3193.53,3899.43) C18.2@3206.34,3912.23 ; 3193.53,3917.53 ccw(c3193.53,3935.64) C18.2@3206.34,3922.84 ; 3193.53,3917.53 cw(c3193.53,3899.43) C18.2@3206.34,3912.23 ; 3193.53,3917.53 ccw(c3193.53,3935.64) C18.2@3206.34,3922.84 ; 3193.53,3917.53 cw(c3193.53,3899.43) C18.2@3206.34,3912.23 ; 3193.53,3917.53 ccw(c3193.53,3935.64) C18.2@3206.34,3922.84 ; C18.2@3216.94,3912.23 cw(c3229.75,3899.43) 3229.75,3917.53 ; C18.2@3216.94,3912.23 cw(c3229.75,3899.43) 3229.75,3917.53 ; C18.2@3216.94,3912.23 cw(c3229.75,3899.43) 3229.75,3917.53 ; C18.2@3216.94,3922.84 ccw(c3229.75,3935.64) 3229.75,3917.53 ; C18.2@3216.94,3922.84 ccw(c3229.75,3935.64) 3229.75,3917.53 ; C18.2@3216.94,3922.84 ccw(c3229.75,3935.64) 3229.75,3917.53 ; 3251.75,3917.53 ccw(c3251.75,3939.94) L3.1@3267.6,3924.1 ; 3251.75,3917.53 ccw(c3251.75,3939.94) L3.1@3267.6,3924.1 ; 3251.75,3917.53 ccw(c3251.75,3939.94) L3.1@3267.6,3924.1
NetC22_1: C22.1 R6.2 U5.8 | length 627.4
  Top Layer w12: 3336.25,3788.87 ccw(c3336.25,3800.3) U5.8@3344.33,3792.22 ; U5.8@3349.79,3791.2 3284.52,3791.2 3288.65,3788.87 R6.2@3288.65,3726.82 ; U5.8@3349.99,3788.87 ccw(c3349.99,3792.22) U5.8@3353.33,3792.22 ; C22.1@3276.58,3780.74 cw(c3247.44,3751.6) 3288.65,3751.6 ; C22.1@3276.58,3780.74 cw(c3247.44,3751.6) 3288.65,3751.6 ; C22.1@3276.58,3780.74 cw(c3247.44,3751.6) 3288.65,3751.6 ; R6.2@3280.52,3734.96 ccw(c3260.88,3754.59) 3288.65,3754.59 ; R6.2@3280.52,3734.96 ccw(c3260.88,3754.59) 3288.65,3754.59 ; R6.2@3280.52,3734.96 ccw(c3260.88,3754.59) 3288.65,3754.59 ; R6.2@3284.71,3730.76 ccw(c3288.65,3730.76) R6.2@3288.65,3726.82 ; R6.2@3284.71,3730.76 ccw(c3288.65,3730.76) R6.2@3288.65,3726.82 ; R6.2@3284.71,3730.76 ccw(c3288.65,3730.76) R6.2@3288.65,3726.82 ; R6.2@3284.71,3730.76 ccw(c3288.65,3730.76) R6.2@3288.65,3726.82 ; C22.1@3284.71,3788.87 cw(c3284.71,3784.93) C22.1@3288.65,3784.93 ; C22.1@3284.71,3788.87 cw(c3284.71,3784.93) C22.1@3288.65,3784.93 ; C22.1@3284.71,3788.87 cw(c3284.71,3784.93) C22.1@3288.65,3784.93 ; C22.1@3284.71,3788.87 cw(c3284.71,3784.93) C22.1@3288.65,3784.93 ; C22.1@3284.71,3788.87 cw(c3284.71,3784.93) C22.1@3288.65,3784.93 ; C22.1@3284.71,3788.87 cw(c3284.71,3784.93) C22.1@3288.65,3784.93 ; R6.2@3288.65,3726.82 cw(c3298.15,3736.33) 3284.71,3736.33 ccw(c3298.15,3736.33) R6.2@3288.65,3726.82 ; 3288.65,3754.59 ccw(c3316.41,3754.59) R6.2@3296.78,3734.96 ; 3288.65,3754.59 ccw(c3316.41,3754.59) R6.2@3296.78,3734.96 ; 3288.65,3754.59 ccw(c3316.41,3754.59) R6.2@3296.78,3734.96 ; 3288.65,3770.61 cw(c3302.97,3770.61) C22.1@3292.84,3780.74 ; 3288.65,3770.61 cw(c3302.97,3770.61) C22.1@3292.84,3780.74 ; 3288.65,3770.61 cw(c3302.97,3770.61) C22.1@3292.84,3780.74 ; C22.1@3292.84,3780.74 cw(c3318.09,3755.49) 3318.09,3791.2 ccw(c3318.09,3755.49) C22.1@3292.84,3780.74 ; C22.1@3292.84,3780.74 cw(c3312.47,3761.11) 3312.47,3788.87 cw(c3312.47,3816.63) C22.1@3292.84,3797 ; C22.1@3292.84,3797 ccw(c3306.86,3811.02) 3306.86,3791.2 cw(c3306.86,3811.02) C22.1@3292.84,3797 ; U5.8@3351.63,3791.51 ccw(c3351.63,3793.92) U5.8@3353.33,3792.22 ; U5.8@3351.63,3791.51 ccw(c3351.63,3793.92) U5.8@3353.33,3792.22 ; U5.8@3351.63,3791.51 ccw(c3351.63,3793.92) U5.8@3353.33,3792.22
NetC23_2: C23.2 R9.2 U5.14 | length 594.9
  Top Layer w12: U5.14@3597.43,3918.2 3649.92,3918.2 3691.3,3876.82 3696.59,3876.82 3753.59,3933.83 C23.2@3759.12,3933.83 ; 3668.26,3899.87 ccw(c3696.13,3927.74) R9.2@3696.13,3888.32 ; 3668.26,3899.87 ccw(c3696.13,3927.74) R9.2@3696.13,3888.32 ; 3668.26,3899.87 ccw(c3696.13,3927.74) R9.2@3696.13,3888.32 ; R9.2@3679.91,3888.21 cw(c3668.52,3876.82) R9.2@3684.63,3876.82 ; R9.2@3679.91,3888.21 cw(c3668.52,3876.82) R9.2@3684.63,3876.82 ; R9.2@3679.91,3888.21 cw(c3668.52,3876.82) R9.2@3684.63,3876.82 ; R9.2@3696.13,3888.32 ccw(c3696.13,3917.19) 3716.54,3896.78 ; R9.2@3696.13,3888.32 ccw(c3696.13,3917.19) 3716.54,3896.78 ; R9.2@3696.13,3888.32 ccw(c3696.13,3917.19) 3716.54,3896.78 ; R9.2@3707.63,3876.82 cw(c3734.29,3876.82) 3715.44,3895.68 ; R9.2@3707.63,3876.82 cw(c3734.29,3876.82) 3715.44,3895.68 ; R9.2@3707.63,3876.82 cw(c3734.29,3876.82) 3715.44,3895.68 ; 3730.05,3910.29 cw(c3759.12,3881.22) C23.2@3759.12,3922.33 ; 3730.05,3910.29 cw(c3759.12,3881.22) C23.2@3759.12,3922.33 ; 3730.05,3910.29 cw(c3759.12,3881.22) C23.2@3759.12,3922.33 ; C23.2@3743.4,3923.64 ccw(c3733.21,3933.83) C23.2@3747.62,3933.83 ; C23.2@3743.4,3923.64 ccw(c3733.21,3933.83) C23.2@3747.62,3933.83 ; C23.2@3743.4,3923.64 ccw(c3733.21,3933.83) C23.2@3747.62,3933.83
NetC26_1: C26.1 D2.1 L5.1 | length 467.3
  Top Layer w20: D2.1@3032.74,3733.75 C26.1@3099.67,3733.75 L5.1@3099.67,3674.7 ; D2.1@3038.05,3728.45 cw(c3050.85,3715.65) 3050.85,3733.75 ; D2.1@3038.05,3728.45 cw(c3050.85,3715.65) 3050.85,3733.75 ; D2.1@3038.05,3728.45 cw(c3050.85,3715.65) 3050.85,3733.75 ; D2.1@3038.05,3739.06 ccw(c3050.85,3751.86) 3050.85,3733.75 ; D2.1@3038.05,3739.06 ccw(c3050.85,3751.86) 3050.85,3733.75 ; D2.1@3038.05,3739.06 ccw(c3050.85,3751.86) 3050.85,3733.75 ; 3081.57,3733.75 cw(c3081.57,3715.65) C26.1@3094.37,3728.45 ; 3081.57,3733.75 ccw(c3081.57,3751.86) C26.1@3094.37,3739.06 ; 3081.57,3733.75 cw(c3081.57,3715.65) C26.1@3094.37,3728.45 ; 3081.57,3733.75 ccw(c3081.57,3751.86) C26.1@3094.37,3739.06 ; 3081.57,3733.75 cw(c3081.57,3715.65) C26.1@3094.37,3728.45 ; 3081.57,3733.75 ccw(c3081.57,3751.86) C26.1@3094.37,3739.06 ; L5.1@3094.37,3680 ccw(c3081.57,3692.8) 3099.67,3692.8 ; L5.1@3094.37,3680 ccw(c3081.57,3692.8) 3099.67,3692.8 ; L5.1@3094.37,3680 ccw(c3081.57,3692.8) 3099.67,3692.8 ; C26.1@3094.37,3728.45 cw(c3081.57,3715.65) 3099.67,3715.65 ; C26.1@3094.37,3728.45 cw(c3081.57,3715.65) 3099.67,3715.65 ; C26.1@3094.37,3728.45 cw(c3081.57,3715.65) 3099.67,3715.65 ; 3099.67,3692.8 ccw(c3117.78,3692.8) L5.1@3104.98,3680 ; 3099.67,3692.8 ccw(c3117.78,3692.8) L5.1@3104.98,3680 ; 3099.67,3692.8 ccw(c3117.78,3692.8) L5.1@3104.98,3680 ; 3099.67,3715.65 cw(c3117.78,3715.65) C26.1@3104.98,3728.45 ; 3099.67,3715.65 cw(c3117.78,3715.65) C26.1@3104.98,3728.45 ; 3099.67,3715.65 cw(c3117.78,3715.65) C26.1@3104.98,3728.45
NetC27_1: C27.1 D1.1 L4.2 | length 383.9
  Top Layer w20: C27.1@3091.8,3914.86 3095.73,3910.92 D1.1@3095.73,3792.81 ; C27.1@3086.49,3909.55 cw(c3064.19,3887.24) 3095.73,3887.24 ; C27.1@3086.49,3909.55 cw(c3064.19,3887.24) 3095.73,3887.24 ; C27.1@3086.49,3909.55 cw(c3064.19,3887.24) 3095.73,3887.24 ; D1.1@3090.43,3798.11 ccw(c3077.63,3810.91) 3095.73,3810.91 ; D1.1@3090.43,3798.11 ccw(c3077.63,3810.91) 3095.73,3810.91 ; D1.1@3090.43,3798.11 ccw(c3077.63,3810.91) 3095.73,3810.91 ; 3095.73,3810.91 ccw(c3113.84,3810.91) D1.1@3101.04,3798.11 ; 3095.73,3810.91 ccw(c3113.84,3810.91) D1.1@3101.04,3798.11 ; 3095.73,3810.91 ccw(c3113.84,3810.91) D1.1@3101.04,3798.11 ; 3095.73,3831.48 cw(c3117.07,3831.48) L4.2@3101.98,3846.56 ; 3095.73,3831.48 cw(c3117.07,3831.48) L4.2@3101.98,3846.56 ; 3095.73,3831.48 cw(c3117.07,3831.48) L4.2@3101.98,3846.56 ; 3095.73,3872.25 ccw(c3117.07,3872.25) L4.2@3101.98,3857.17 ; 3095.73,3872.25 ccw(c3117.07,3872.25) L4.2@3101.98,3857.17 ; 3095.73,3872.25 ccw(c3117.07,3872.25) L4.2@3101.98,3857.17
NetC29_1: C29.1 D1.2 D2.2 L6.2 | length 702.5
  Top Layer w15: C29.1@2972.74,3790.53 cw(c2975.97,3790.53) C29.1@2973.69,3792.81 ccw(c2975.97,3790.53) C29.1@2972.74,3790.53
  Top Layer w20: L6.2@2981.56,3671.71 2981.56,3724.93 D2.2@2972.74,3733.75 ; D1.2@3035.73,3792.81 C29.1@2973.69,3792.81 2973.69,3734.7 D2.2@2972.75,3733.76 ; D2.2@2967.44,3728.45 cw(c2933.35,3694.36) 2981.56,3694.36 ; D2.2@2967.44,3728.45 cw(c2933.35,3694.36) 2981.56,3694.36 ; D2.2@2967.44,3728.45 cw(c2933.35,3694.36) 2981.56,3694.36 ; D2.2@2967.44,3739.06 ccw(c2952.36,3754.14) 2973.69,3754.14 ; D2.2@2967.44,3739.06 ccw(c2952.36,3754.14) 2973.69,3754.14 ; D2.2@2967.44,3739.06 ccw(c2952.36,3754.14) 2973.69,3754.14 ; C29.1@2968.38,3787.5 cw(c2955.58,3774.7) 2973.69,3774.7 ; C29.1@2968.38,3787.5 cw(c2955.58,3774.7) 2973.69,3774.7 ; C29.1@2968.38,3787.5 cw(c2955.58,3774.7) 2973.69,3774.7 ; D2.2@2972.75,3733.76 ccw(c2970.46,3736.03) 2973.69,3736.03 cw(c2970.46,3736.03) D2.2@2972.75,3733.76 ; 2973.69,3774.7 cw(c2991.79,3774.7) C29.1@2978.99,3787.5 ; 2973.69,3774.7 cw(c2991.79,3774.7) C29.1@2978.99,3787.5 ; 2973.69,3774.7 cw(c2991.79,3774.7) C29.1@2978.99,3787.5 ; L6.2@2976.26,3677.01 ccw(c2963.45,3689.81) 2981.56,3689.81 ; L6.2@2976.26,3677.01 ccw(c2963.45,3689.81) 2981.56,3689.81 ; L6.2@2976.26,3677.01 ccw(c2963.45,3689.81) 2981.56,3689.81 ; C29.1@2978.99,3787.5 cw(c2991.79,3774.7) 2991.79,3792.81 ; C29.1@2978.99,3787.5 cw(c2991.79,3774.7) 2991.79,3792.81 ; C29.1@2978.99,3787.5 cw(c2991.79,3774.7) 2991.79,3792.81 ; C29.1@2978.99,3798.11 ccw(c2991.79,3810.91) 2991.79,3792.81 ; C29.1@2978.99,3798.11 ccw(c2991.79,3810.91) 2991.79,3792.81 ; C29.1@2978.99,3798.11 ccw(c2991.79,3810.91) 2991.79,3792.81 ; 2981.56,3689.81 ccw(c2999.67,3689.81) L6.2@2986.86,3677.01 ; 2981.56,3689.81 ccw(c2999.67,3689.81) L6.2@2986.86,3677.01 ; 2981.56,3689.81 ccw(c2999.67,3689.81) L6.2@2986.86,3677.01 ; 3017.63,3792.81 cw(c3017.63,3774.7) D1.2@3030.43,3787.5 ; 3017.63,3792.81 ccw(c3017.63,3810.91) D1.2@3030.43,3798.11 ; 3017.63,3792.81 cw(c3017.63,3774.7) D1.2@3030.43,3787.5 ; 3017.63,3792.81 ccw(c3017.63,3810.91) D1.2@3030.43,3798.11 ; 3017.63,3792.81 cw(c3017.63,3774.7) D1.2@3030.43,3787.5 ; 3017.63,3792.81 ccw(c3017.63,3810.91) D1.2@3030.43,3798.11
NetC29_2: C29.2 C30.1 L7.2 | length 686.4
  Top Layer w15: C29.2@2911.64,3797.75 ccw(c2918.63,3797.75) C29.2@2913.69,3792.81 ; L7.2@2911.64,3851.86 ccw(c2904.42,3859.09) 2914.63,3859.09 C30.1@2914.63,3914.86 ; L7.2@2904.57,3858.93 ccw(c2880.27,3883.23) 2914.63,3883.23 ; L7.2@2904.57,3858.93 ccw(c2880.27,3883.23) 2914.63,3883.23 ; L7.2@2904.57,3858.93 ccw(c2880.27,3883.23) 2914.63,3883.23 ; C30.1@2907.56,3907.78 cw(c2890.49,3890.71) 2914.63,3890.71 ; C30.1@2907.56,3907.78 cw(c2890.49,3890.71) 2914.63,3890.71 ; C30.1@2907.56,3907.78 cw(c2890.49,3890.71) 2914.63,3890.71 ; 2914.63,3890.71 cw(c2938.77,3890.71) C30.1@2921.7,3907.78 ; 2914.63,3890.71 cw(c2938.77,3890.71) C30.1@2921.7,3907.78 ; 2914.63,3890.71 cw(c2938.77,3890.71) C30.1@2921.7,3907.78
  Top Layer w20: C29.2@2911.64,3797.75 L7.2@2911.64,3851.86 C30.1@2911.64,3907.63 ; L7.2@2906.34,3846.56 cw(c2893.53,3833.76) 2911.64,3833.76 ; L7.2@2906.34,3846.56 cw(c2893.53,3833.76) 2911.64,3833.76 ; L7.2@2906.34,3846.56 cw(c2893.53,3833.76) 2911.64,3833.76 ; L7.2@2906.34,3857.17 ccw(c2893.53,3869.97) 2911.64,3869.97 ; L7.2@2906.34,3857.17 ccw(c2893.53,3869.97) 2911.64,3869.97 ; L7.2@2906.34,3857.17 ccw(c2893.53,3869.97) 2911.64,3869.97 ; 2911.64,3815.86 ccw(c2936.74,3815.86) C29.2@2918.99,3798.11 ; 2911.64,3815.86 ccw(c2936.74,3815.86) C29.2@2918.99,3798.11 ; 2911.64,3815.86 ccw(c2936.74,3815.86) C29.2@2918.99,3798.11 ; 2911.64,3833.76 cw(c2929.75,3833.76) L7.2@2916.94,3846.56 ; 2911.64,3833.76 cw(c2929.75,3833.76) L7.2@2916.94,3846.56 ; 2911.64,3833.76 cw(c2929.75,3833.76) L7.2@2916.94,3846.56 ; 2911.64,3869.97 ccw(c2929.75,3869.97) L7.2@2916.94,3857.17 ; 2911.64,3869.97 ccw(c2929.75,3869.97) L7.2@2916.94,3857.17 ; 2911.64,3869.97 ccw(c2929.75,3869.97) L7.2@2916.94,3857.17 ; 2911.64,3889.53 cw(c2939.96,3889.53) C30.1@2919.94,3909.55 ; 2911.64,3889.53 cw(c2939.96,3889.53) C30.1@2919.94,3909.55 ; 2911.64,3889.53 cw(c2939.96,3889.53) C30.1@2919.94,3909.55 ; C30.1@2911.64,3907.63 cw(c2921.86,3907.63) C30.1@2914.63,3914.86 ccw(c2921.86,3907.63) C30.1@2911.64,3907.63